# EAGLE board SendSlice (EAGLE 7.5.0)
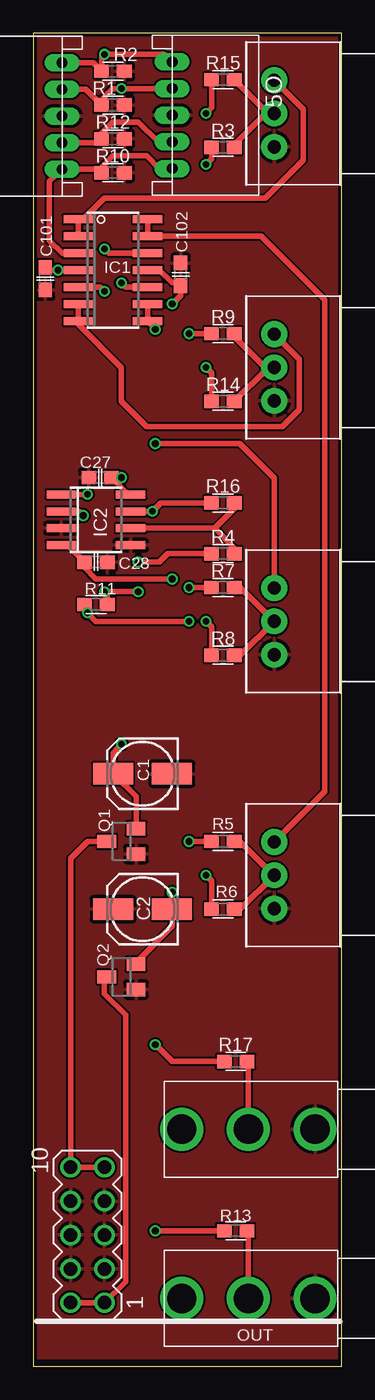
[diagram p0: board, top side]
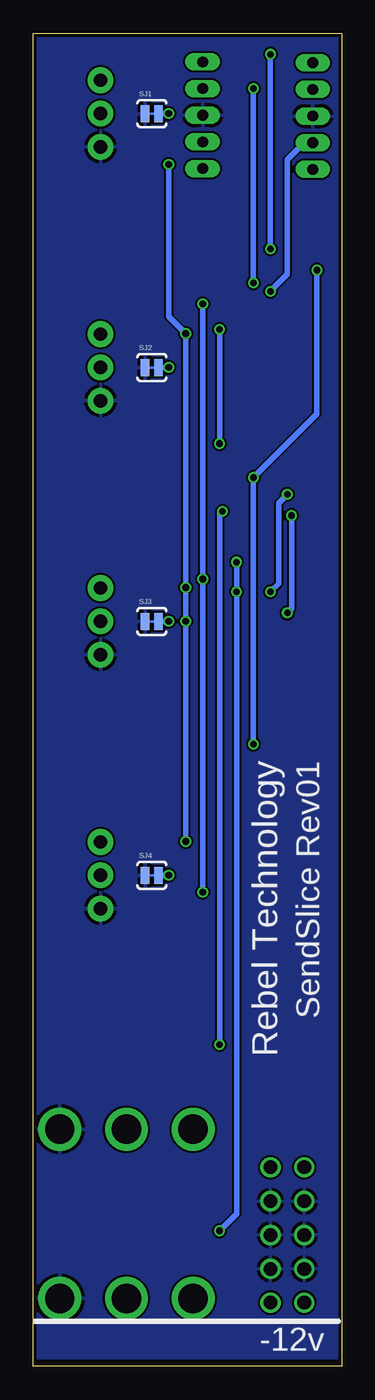
[diagram p1: board, bottom side, seen from below]

Size 23.11 x 100 mm. Coordinates in mm from the lower left corner, seen from the top.
Outline: 23.11,0 23.11,100 0,100 0,0 23.11,0
Copper layers (1*16): Top 0.035mm / dielectric 1.5mm / Bottom 0.035mm
Design rules "SeeedStudio_2layer_DRU_no_angle_20140221": minimum track width 6mil, minimum drill 12mil, track to track 6mil, track to pad 6mil, pad to pad 6mil, via to via 6mil, smd to smd 0mil, copper to edge 10mil, drill to drill 10mil, minimum pad ring 10mil, minimum via ring 6mil, stop-mask expansion 2mil, vias tented up to drill 100mil, thermal gap 10mil

## Footprints (pad centres in the part's own frame; a part is rotated, then mirrored left to right if it is on the bottom)
CON-JST_PH_5W = drill 0.8 long: P1 0,0; P2 -2,0; P3 -4,0; P4 -6,0; P5 -8,0
153CLV-0505 = smd 3 x 1.6: + 2.2,0; - -2.2,0
C0603 = smd 1.1 x 1: 1 -0.85,0; 2 0.85,0
SO14 = smd 0.6 x 2.2: 1 -3.81,-2.6; 2 -2.54,-2.6; 3 -1.27,-2.6; 4 0,-2.6; 5 1.27,-2.6; 6 2.54,-2.6; 7 3.81,-2.6; 8 3.81,2.6; 9 2.54,2.6; 10 1.27,2.6; 11 0,2.6; 12 -1.27,2.6; 13 -2.54,2.6; 14 -3.81,2.6
SO08 = smd 0.6 x 2.2: 1 -1.905,-2.6; 2 -0.635,-2.6; 3 0.635,-2.6; 4 1.905,-2.6; 5 1.905,2.6; 6 0.635,2.6; 7 -0.635,2.6; 8 -1.905,2.6
UJ-3502-R = drill 2.2: P$1 0,0; P$2 0,5; P$3 0,-5
SOT23 = smd 1 x 1.4: 1 -0.95,-1.1; 2 0.95,-1.1; 3 0,1.1
0603 = smd 1.1 x 1: 1 -0.85,0; 2 0.85,0
SJ_2S-TRACE = smd 0.635 x 1.27: 1 -0.508,0; 2 0.508,0
MA05-2 = drill 1.016: 1 -5.08,-1.27; 2 -5.08,1.27; 3 -2.54,-1.27; 4 -2.54,1.27; 5 0,-1.27; 6 0,1.27; 7 2.54,-1.27; 8 2.54,1.27; 9 5.08,-1.27; 10 5.08,1.27
POT-BOURNS-PTD901 = drill 1 pad 1.93: 1 -2.5,-0.036; 2 0,-0.036; 3 2.5,-0.036

## Placement (x,y rotation side)
5O  CON-JST_PH_5W  [CON-JST_PH_5W]  10.41,89.85 270 top
5O1  CON-JST_PH_5W  [CON-JST_PH_5W]  2.16,97.79 90 top
C1  10u  [153CLV-0505]  8.19,44.45 180 top
C2  10u  [153CLV-0505]  8.19,34.29 180 top
C27  100n  [C0603]  5.02,66.67 180 top
C28  100n  [C0603]  4.7,60.33 0 top
C101  100n  [C0603]  0.89,81.6 270 top
C102  100n  [C0603]  11.05,81.92 90 top
IC1  QUAD_OPAMPD  [SO14]  5.97,82.23 270 top
IC2  TL072D  [SO08]  4.7,63.5 270 top
OUT  JACK-UJ-3502-R  [UJ-3502-R]  16.13,5.08 90 top
OUT_INV  JACK-UJ-3502-R  [UJ-3502-R]  16.13,17.78 90 top
Q1  SI2309CDS  [SOT23]  6.6,39.37 90 top
Q2  BSS123  [SOT23]  6.6,29.21 90 top
R1  1M  [0603]  5.97,94.61 0 top
R2  1M  [0603]  5.97,97.16 0 top
R3  10k  [0603]  14.22,91.44 0 top
R4  10k  [0603]  14.22,60.96 0 top
R5  10k  [0603]  14.22,39.37 0 top
R6  2k7  [0603]  14.22,34.29 180 top
R7  10k  [0603]  14.22,58.42 0 top
R8  2k7  [0603]  14.22,53.34 180 top
R9  10k  [0603]  14.22,77.47 0 top
R10  1M  [0603]  5.97,89.53 0 top
R11  20k  [0603]  4.7,57.15 0 top
R12  1M  [0603]  5.97,92.08 0 top
R13  1k  [0603]  15.18,10.16 0 top
R14  2k7  [0603]  14.22,72.39 180 top
R15  2k7  [0603]  14.22,96.52 180 top
R16  10k  [0603]  14.22,64.77 180 top
R17  1k  [0603]  15.18,22.86 0 top
SJ1  SOLDERJUMPERTRACE  [SJ_2S-TRACE]  14.22,93.98 0 bottom
SJ2  SOLDERJUMPERTRACE  [SJ_2S-TRACE]  14.22,74.93 0 bottom
SJ3  SOLDERJUMPERTRACE  [SJ_2S-TRACE]  14.22,55.88 0 bottom
SJ4  SOLDERJUMPERTRACE  [SJ_2S-TRACE]  14.22,36.83 0 bottom
SV1  [MA05-2]  4.06,9.84 90 top
U$1  POT-BOURNS-PTD901  [POT-BOURNS-PTD901]  18.03,93.98 90 top
U$2  POT-BOURNS-PTD901  [POT-BOURNS-PTD901]  18.03,74.93 90 top
U$3  POT-BOURNS-PTD901  [POT-BOURNS-PTD901]  18.03,55.88 90 top
U$4  POT-BOURNS-PTD901  [POT-BOURNS-PTD901]  18.03,36.83 90 top

## Library data of the parts
5O 5O1 C27 C28 C101 C102 OUT OUT_INV R1-R17 U$1-U$4 = Rebel
C1 C2 = rcl
IC1 = adafruit
IC2 = linear
Q1 Q2 = transistor-small-signal
SJ1-SJ4 = SparkFun
SV1 = con-lstb; OC_FARNELL: unknown; OC_NEWARK: unknown

## Nets
+12V: C1.+ C27.1 C101.1 IC1.4 IC2.8 Q1.2
-12V: C2.- C28.1 C102.1 IC1.11 IC2.4 Q2.2
GND: 5O1.P3 5O.P3 C1.- C2.+ C27.2 C28.2 C101.2 C102.2 IC2.3 IC2.5 OUT.P$3 OUT_INV.P$3 Q1.1 Q2.1 R1.2 R2.2 R10.2 R12.2 SJ1.1 SJ2.1 SJ3.1 SJ4.1 SV1.3 SV1.4 SV1.5 SV1.6 SV1.7 SV1.8 U$1.1 U$2.1 U$3.1 U$4.1
IN_1: 5O1.P1 5O.P5 IC1.12 R2.1
IN_2: 5O1.P2 5O.P4 IC1.10 R1.1
IN_3: 5O1.P4 5O.P2 IC1.5 R12.1
IN_4: 5O1.P5 5O.P1 IC1.3 R10.1
N$1: Q2.3 SV1.1 SV1.2
N$2: R9.2 R14.1 U$2.2
N$3: R3.2 R15.1 U$1.2
N$4: IC1.6 IC1.7 U$2.3
N$5: IC1.1 IC1.2 U$1.3
N$6: IC2.1 R4.1 R11.2 R13.1
N$7: IC2.7 R16.2 R17.1
N$8: IC2.2 R3.1 R5.1 R7.1 R9.1 R11.1
N$9: OUT.P$1 R13.2
N$10: R15.2 SJ1.2
N$11: IC1.13 IC1.14 U$4.3
N$12: R6.2 SJ4.2
N$13: IC1.8 IC1.9 U$3.3
N$14: Q1.3 SV1.9 SV1.10
N$15: R8.2 SJ3.2
N$16: R14.2 SJ2.2
N$17: IC2.6 R4.2 R16.1
N$18: OUT_INV.P$1 R17.2
N$29: R5.2 R6.1 U$4.2
N$51: R7.2 R8.1 U$3.2

## Tracks (layer width: path | path; a pad name or v marks a point on that pad's centre or on a via)
+12V  (via drill 0.5)
  Top 0.406: Q1.2 7.7,42.74 C1.+ 5.99,46.02 v6.6,46.67 | IC1.4 v1.84,82.23 1.1,82.23 C101.1 | v6.6,66.67 C27.1 7.14,65.41 IC2.8
  Bottom 0.406: v6.6,46.67 v6.6,66.67 1.84,71.44 v1.84,82.23
-12V  (via drill 0.5)
  Top 0.406: Q2.2 7.7,30.31 10.41,33.02 10.41,34.27 C2.- 10.39,35.54 v10.41,35.56 | IC1.11 9.46,82.23 10.41,81.28 10.83,81.28 C102.1 11.05,80.33 v10.41,79.69 | IC2.4 2.58,61.59 C28.1 3.85,59.91 4.7,59.05 v10.41,59.05
  Bottom 0.406: v10.41,35.56 v10.41,59.05 v10.41,79.69
GND
  pour Bottom: -13.72,0.64 30.73,0.64 30.73,100.97 -13.72,100.97
  pour Top: -12.45,0.64 32,0.64 32,100.97 -12.45,100.97
IN_1  (via drill 0.5)
  Top 0.406: 5O1.P1 4.48,97.79 R2.1 5.12,98.21 v5.33,98.42 9.78,98.42 10.35,97.85 5O.P5 | IC1.12 5.65,83.5 v5.33,83.82
  Bottom 0.406: v5.33,83.82 v5.33,98.42
IN_2  (via drill 0.5)
  Top 0.406: 5O1.P2 3.94,95.79 R1.1 5.12,95.03 5.94,95.85 v6.6,95.85 5O.P4 | IC1.10 6.92,80.96 v6.6,81.28
  Bottom 0.406: v6.6,81.28 v6.6,95.85
IN_3  (via drill 0.5)
  Top 0.406: 5O1.P4 4.83,91.79 R12.1 5.12,92.5 5.97,93.34 7.87,93.34 9.37,91.85 5O.P2 | IC1.5 5.02,80.96 v5.33,80.64
  Bottom 0.406: v5.33,80.64 4.06,81.92 4.06,90.52 2.79,91.79 5O1.P4
IN_4
  Top 0.406: 5O.P1 9.46,89.85 8.51,90.81 5.97,90.81 5.12,89.95 R10.1 4.86,89.79 5O1.P5 1.21,88.9 1.21,84.45 2.16,83.5 IC1.3
N$1
  Top 0.406: SV1.2 SV1.1 6.92,6.35 6.92,26.35 5.33,27.94 5.33,29.04 Q2.3
N$2
  Top 0.406: U$2.2 17.61,74.93 17.51,74.82 | 17.51,74.82 R14.1 | R9.2 15.07,77.25 17.51,74.82
N$3
  Top 0.406: U$1.2 17.61,93.98 17.51,94.09 | 17.51,94.09 R15.1 | R3.2 15.07,91.66 17.51,94.09
N$4
  Top 0.406: U$2.3 19.94,75.56 19.94,71.75 18.67,70.48 8.51,70.48 6.6,72.39 6.6,74.93 3.37,78.17 IC1.7 IC1.6
N$5
  Top 0.406: IC1.2 IC1.1 3.75,86.04 5.33,87.63 17.4,87.63 20.26,90.49 20.26,94.29 U$1.3
N$6  (via drill 0.5)
  Top 0.406: v7.87,58.1 v5.33,58.1 5.55,57.89 R11.2 | R4.1 10.1,60.96 9.46,60.33 v7.87,60.33 | v9.14,10.16 R13.1 | IC2.1 v4.06,65.41
  Bottom 0.406: v7.87,60.33 v7.87,58.1 7.87,11.43 v9.14,10.16 | v4.06,65.41 4.7,64.77 4.7,58.74 v5.33,58.1
N$7  (via drill 0.5)
  Top 0.406: IC2.7 v8.93,64.14 9.56,64.77 R16.2 | R17.1 10.41,22.86 v9.14,24.13
  Bottom 0.406: v9.14,24.13 9.14,63.92 v8.93,64.14
N$8  (via drill 0.5)
  Top 0.406: v11.68,39.37 R5.1 | R7.1 v11.68,58.42 | R9.1 v11.68,77.47 | R11.1 3.85,56.73 v4.06,56.52 4.7,55.88 v11.68,55.88 | IC2.2 3.43,64.14 v3.75,63.82 | R3.1 13.37,90.59 v12.95,90.17
  Bottom 0.406: v11.68,39.37 v11.68,55.88 v11.68,58.42 v11.68,77.47 12.95,78.74 v12.95,90.17 | v3.75,63.82 3.75,56.83 v4.06,56.52
N$9
  Top 0.406: OUT.P$1 16.13,10.16 R13.2
N$10  (via drill 0.5)
  Top 0.406: R15.2 13.37,94.4 v12.95,93.98
  Bottom 0.406: v12.95,93.98 SJ1.2
N$11
  Top 0.406: IC1.14 IC1.13 17.08,84.77 21.84,80.01 21.84,43.1 U$4.3
N$12  (via drill 0.5)
  Top 0.406: R6.2 13.37,36.41 v12.95,36.83
  Bottom 0.406: v12.95,36.83 SJ4.2
N$13  (via drill 0.5)
  Top 0.406: U$3.3 18.07,66.64 15.49,69.22 v9.14,69.22 | IC1.9 IC1.8 8.83,78.11 v9.14,77.79
  Bottom 0.406: v9.14,69.22 v9.14,77.79
N$14
  Top 0.406: SV1.9 SV1.10 2.79,38.1 4.06,39.37 Q1.3
N$15  (via drill 0.5)
  Top 0.406: R8.2 13.37,55.46 v12.95,55.88
  Bottom 0.406: v12.95,55.88 SJ3.2
N$16  (via drill 0.5)
  Top 0.406: R14.2 13.37,74.51 v12.95,74.93
  Bottom 0.406: v12.95,74.93 SJ2.2
N$17
  Top 0.406: IC2.6 13.59,62.87 | R16.1 15.07,64.35 13.59,62.87 | R4.2 15.07,61.38 13.59,62.87
N$18
  Top 0.406: OUT_INV.P$1 16.13,22.76 R17.2
N$29
  Top 0.406: R6.1 15.53,34.29 U$4.2 18.03,36.83 15.49,39.37 R5.2
N$51
  Top 0.406: R8.1 15.53,53.34 U$3.2 15.53,58.42 R7.2

## Text on the board
bPlace: SendSlice Rev01 | Rebel Technology | -12v